# EAGLE board PowerloggerBrd (EAGLE 9.7.0)
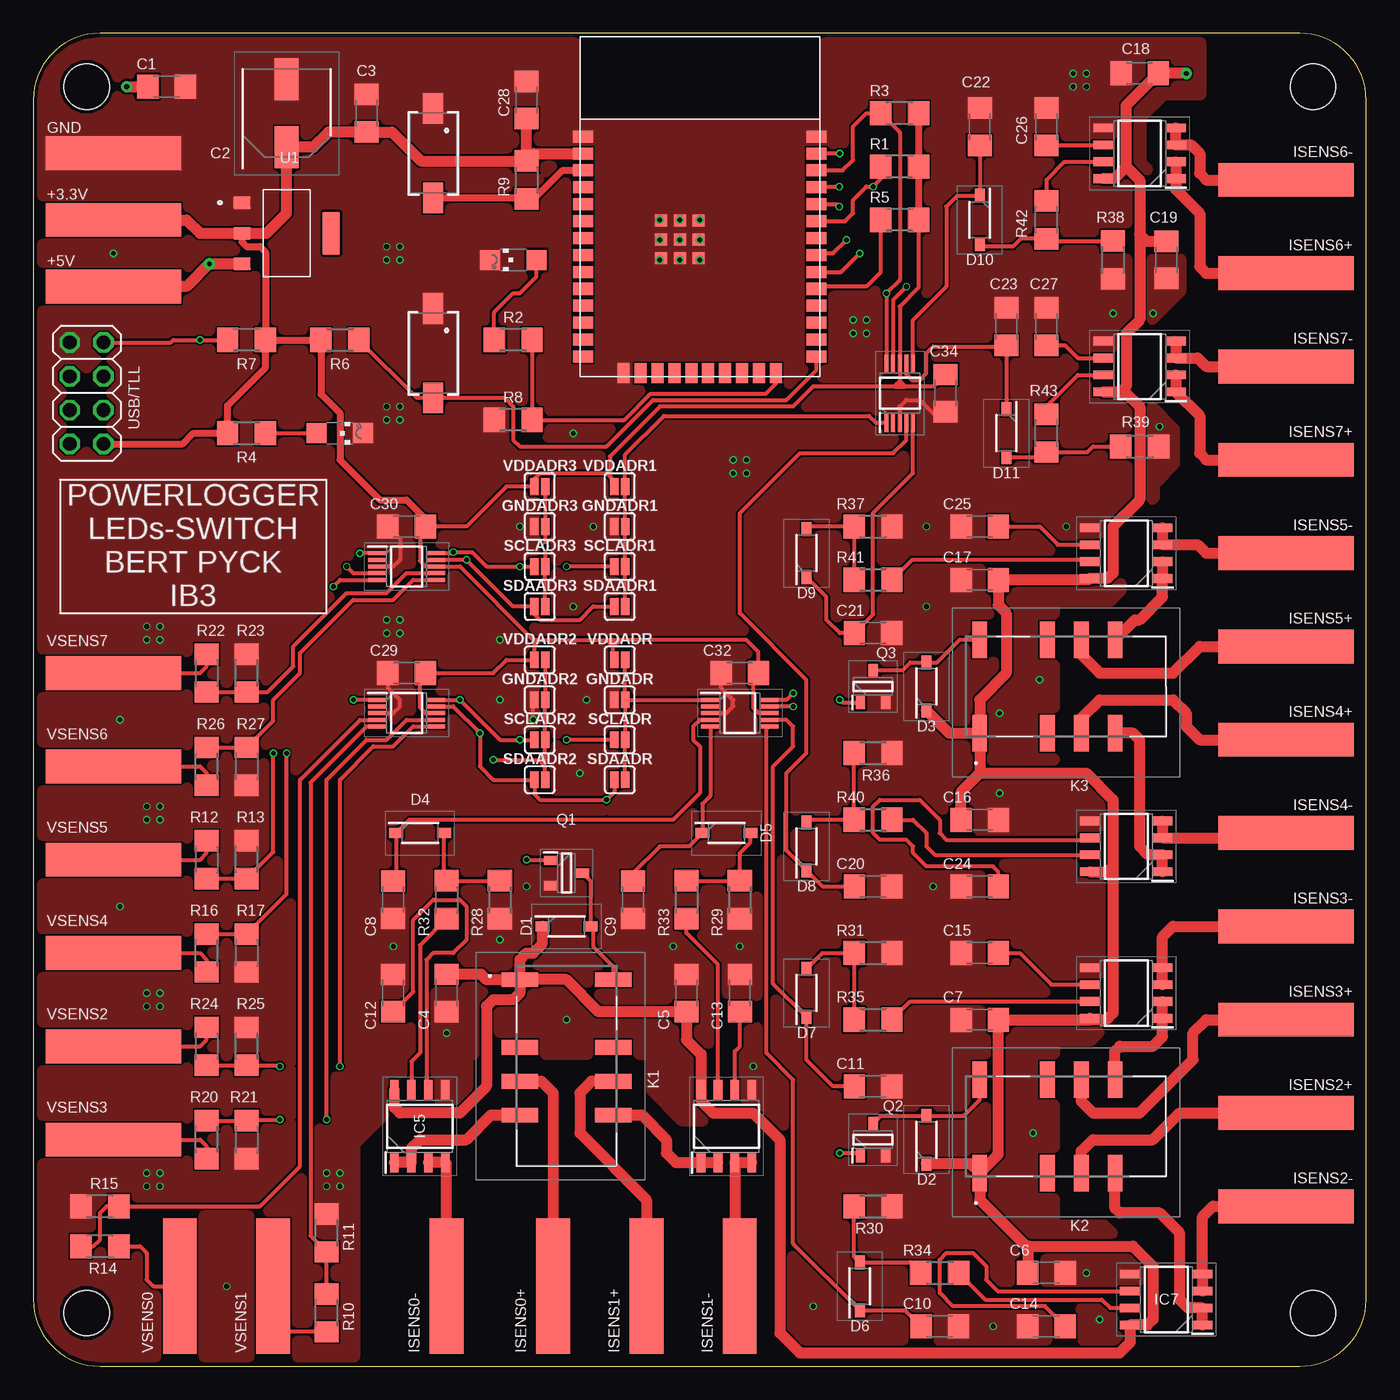
[diagram p0: board, top side]
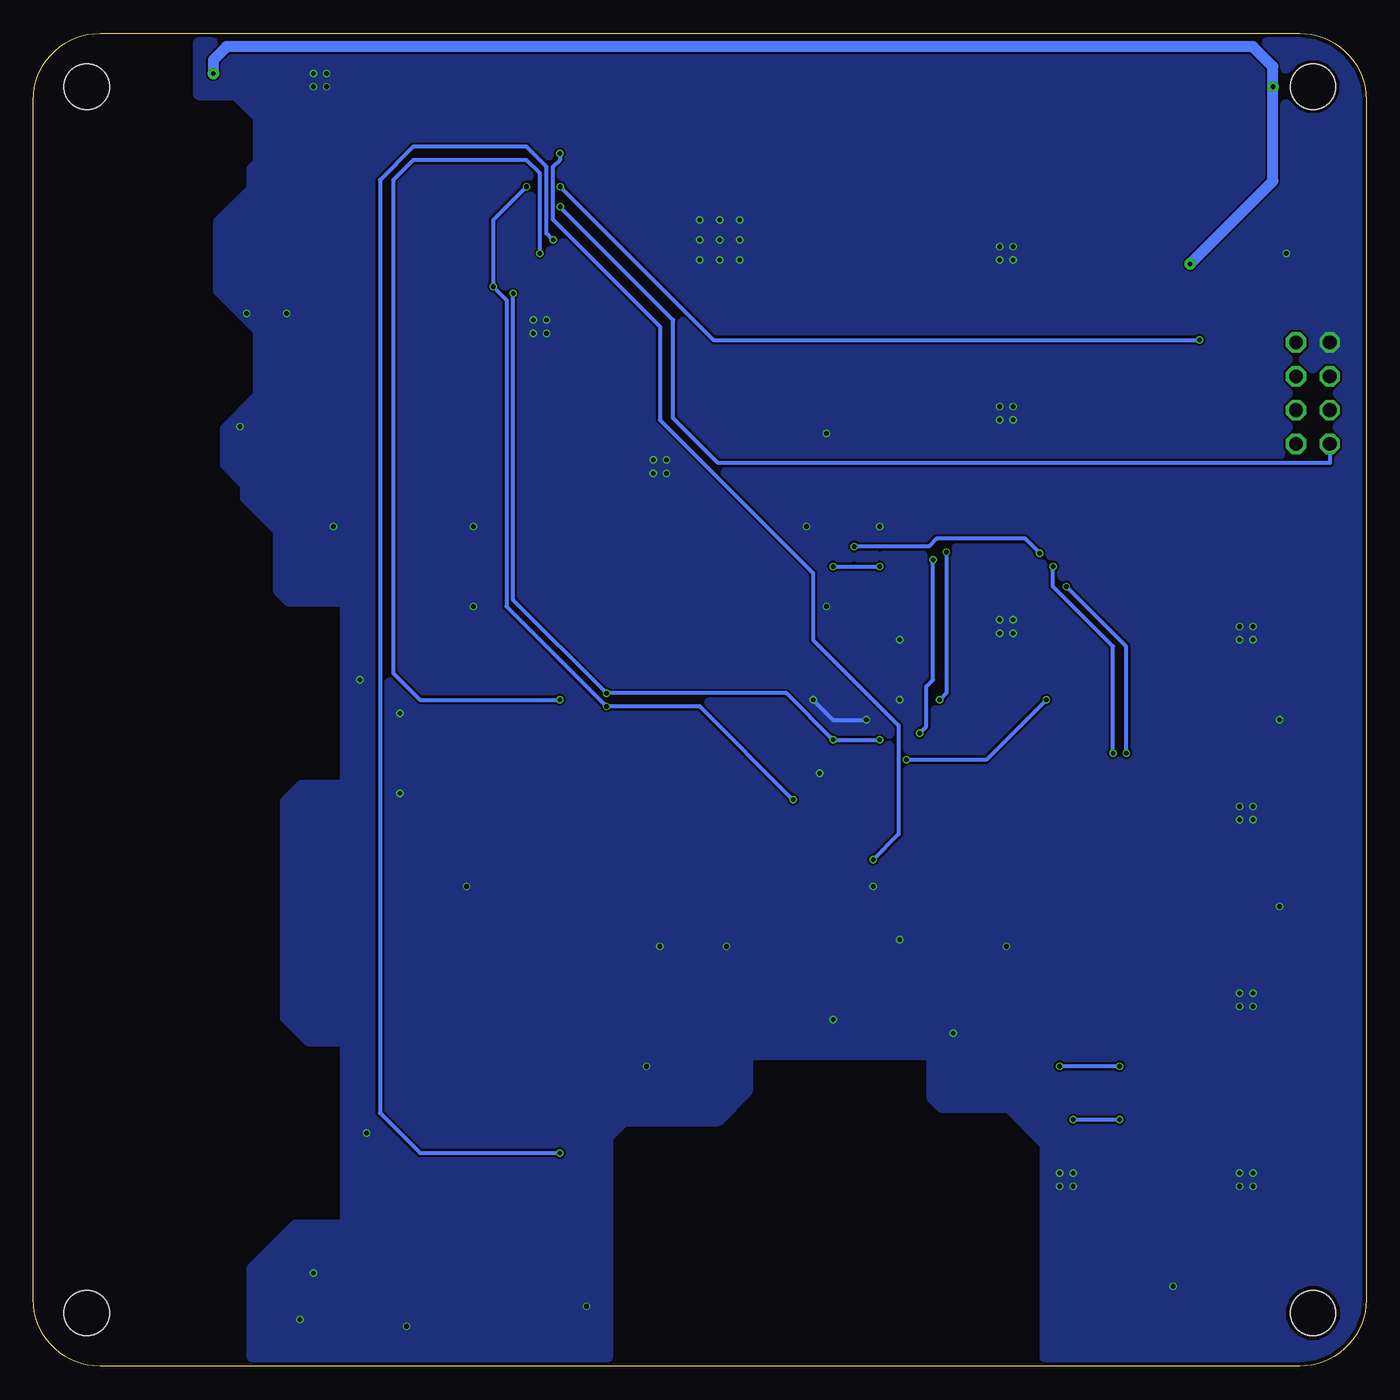
[diagram p1: board, bottom side, seen from below]

Size 100 x 100 mm. Coordinates in mm from the lower left corner, seen from the top.
Outline: 0,95 0,5 arc90 5,0 95,0 arc90 100,5 100,95 arc90 95,100 5,100 arc90 0,95
Copper layers (1*16): Top / Bottom
Stack-up Default Layer Stack: Top User Defined 0.035mm / Dielectric-1 User Defined 1.5mm / Bottom User Defined 0.035mm
Design rules: minimum copper width 6mil, minimum drill size 0.3mm, copper clearance wire_polygon to wire_polygon 6mil, copper clearance wire_polygon to pad_smd 6mil, copper clearance wire_polygon to via 6mil, copper clearance pad_smd to pad_smd 6mil, copper clearance pad_smd to via 6mil, copper clearance via to via 6mil, copper clearance smd to pad (same net) 0mil, copper clearance smd to via (same net) 0mil, copper clearance smd to smd (same net) 0mil, dimension clearance 0.3mm, via restrict clearance 0mil, restrict clearance 0mil, drill distance 10mil, keepout clearance 0mil
Holes 3.4 mm at 4,96 96,96 96,4 4,4

## Footprints (pad centres in the part's own frame; a part is rotated, then mirrored left to right if it is on the bottom)
SOLDERPAD = smd 2.54 x 10.16: 1 0,0
C1206 = smd 1.6 x 1.8: 1 -1.4,0; 2 1.4,0
CAPAE660X550N = smd 3.15 x 1.8: 1 -2.55,0; 2 2.55,0
SOD3715X135N = smd 1.05 x 0.75: 1 -1.8,0; 2 1.8,0
SMT-JUMPER_2_NC_PASTE_SILK = smd 0.635 x 1.27: 1 -0.406,0; 2 0.406,0
SOP50P490X110-10N = smd 1.4 x 0.3: 1 -2.2,1; 2 -2.2,0.5; 3 -2.2,0; 4 -2.2,-0.5; 5 -2.2,-1; 6 2.2,-1; 7 2.2,-0.5; 8 2.2,0; 9 2.2,0.5; 10 2.2,1
SOIC127P600X175-8N = smd 1.525 x 0.65: 1 -2.712,1.905; 2 -2.712,0.635; 3 -2.712,-0.635; 4 -2.712,-1.905; 5 2.712,-1.905; 6 2.712,-0.635; 7 2.712,0.635; 8 2.712,1.905
EE25NUXL = smd 1.11 x 2.73: 1 0,-3.51; 3 5.08,-3.51; 4 7.62,-3.51; 5 10.16,-3.51; 8 10.16,3.51; 9 7.62,3.51; 10 5.08,3.51; 12 0,3.51
CHIPLED_1206 = smd 1.5 x 1.5: A 0,-1.75; C 0,1.75
ESP32-WROOM-32E = smd 1.5 x 0.9: 1 -8.75,8.255; 2 -8.75,6.985; 3 -8.75,5.715; 4 -8.75,4.445; 5 -8.75,3.175; 6 -8.75,1.905; 7 -8.75,0.635; 8 -8.75,-0.635; 9 -8.75,-1.905; 10 -8.75,-3.175; 11 -8.75,-4.445; 12 -8.75,-5.715; 13 -8.75,-6.985; 14 -8.75,-8.255; 25 8.75,-8.255; 26 8.75,-6.985; 27 8.75,-5.715; 28 8.75,-4.445; 29 8.75,-3.175; 30 8.75,-1.905; 31 8.75,-0.635; 32 8.75,0.635; 33 8.75,1.905; 34 8.75,3.175; 35 8.75,4.445; 36 8.75,5.715; 37 8.75,6.985; 38 8.75,8.255 | smd 0.9 x 1.5: 15 -5.715,-9.505; 16 -4.445,-9.505; 17 -3.175,-9.505; 18 -1.905,-9.505; 19 -0.635,-9.505; 20 0.635,-9.505; 21 1.905,-9.505; 22 3.175,-9.505; 23 4.445,-9.505; 24 5.715,-9.505 | smd 0.9 x 0.9: GND@39 -2.9,1.935; GND@40 -1.5,1.935; GND@41 -0.1,1.935; GND@42 -2.9,0.535; GND@43 -1.5,0.535; GND@44 -0.1,0.535; GND@45 -2.9,-0.865; GND@46 -1.5,-0.865; GND@47 -0.1,-0.865
SOT95P240X120-3N = smd 1 x 0.7: 1 -1.2,0.95; 2 -1.2,-0.95; 3 1.2,0
R1206 = smd 1.6 x 1.803: 1 -1.422,0; 2 1.422,0
434111043826 = smd 2.3 x 1.5: 1 -3.35,0; 2 3.35,0
SOT229P700X180-4N = smd 1.31 x 0.93: 1 -3.345,2.29; 2 -3.345,0; 3 -3.345,-2.29 | smd 1.31 x 3.24: 4 3.345,0
2X04 = drill 1.016 octagon: 1 -3.81,-1.27; 2 -3.81,1.27; 3 -1.27,-1.27; 4 -1.27,1.27; 5 1.27,-1.27; 6 1.27,1.27; 7 3.81,-1.27; 8 3.81,1.27

## Placement (x,y rotation side)
+3.3V  [SOLDERPAD]  6,86 270 top
+5V  [SOLDERPAD]  6,81 270 top
C1  10µF  [C1206]  10,96 0 top
C2  47µF  [CAPAE660X550N]  19,94 90 top
C3  100nF  [C1206]  25,94 90 top
C4  0.1µF  [C1206]  31,28 270 top
C5  0.1µF  [C1206]  49,28 90 top
C6  0.1µF  [C1206]  76,7 0 top
C7  0.1µF  [C1206]  71,26 180 top
C8  [C1206]  27,35 270 top
C9  [C1206]  45,35 270 top
C10  [C1206]  68,3 0 top
C11  [C1206]  63,21 0 top
C12  1nF  [C1206]  27,28 90 top
C13  1nF  [C1206]  53,28 90 top
C14  1nF  [C1206]  76,3 180 top
C15  1nF  [C1206]  71,31 180 top
C16  0.1µF  [C1206]  71,41 0 top
C17  0.1µF  [C1206]  71,59 180 top
C18  0.1µF  [C1206]  83,97 180 top
C19  0.1µF  [C1206]  85,83 270 top
C20  [C1206]  63,36 0 top
C21  [C1206]  63,55 0 top
C22  [C1206]  71,93 90 top
C23  [C1206]  73,78 90 top
C24  1nF  [C1206]  71,36 180 top
C25  1nF  [C1206]  71,63 180 top
C26  1nF  [C1206]  76,93 90 top
C27  1nF  [C1206]  76,78 90 top
C28  100nF  [C1206]  37,95 90 top
C29  100nF  [C1206]  28,52 180 top
C30  100nF  [C1206]  28,63 180 top
C32  100nF  [C1206]  53,52 180 top
C34  100nF  [C1206]  68.45,73 270 top
D1  1N4148W-TP  [SOD3715X135N]  40,33 0 top
D2  1N4148W-TP  [SOD3715X135N]  67,17 90 top
D3  1N4148W-TP  [SOD3715X135N]  67,51 90 top
D4  1N4148W-TP  [SOD3715X135N]  29,40 0 top
D5  1N4148W-TP  [SOD3715X135N]  52,40 0 top
D6  1N4148W-TP  [SOD3715X135N]  62,6 90 top
D7  1N4148W-TP  [SOD3715X135N]  58,28 90 top
D8  1N4148W-TP  [SOD3715X135N]  58,39 90 top
D9  1N4148W-TP  [SOD3715X135N]  58,61 90 top
D10  1N4148W-TP  [SOD3715X135N]  71,86 270 top
D11  1N4148W-TP  [SOD3715X135N]  73,70 270 top
GND  [SOLDERPAD]  6,91 270 top
GNDADR  JUMPER-SMT_2_NC_PASTE_SILK  [SMT-JUMPER_2_NC_PASTE_SILK]  44,50 0 top
GNDADR1  JUMPER-SMT_2_NC_PASTE_SILK  [SMT-JUMPER_2_NC_PASTE_SILK]  44,63 0 top
GNDADR2  JUMPER-SMT_2_NC_PASTE_SILK  [SMT-JUMPER_2_NC_PASTE_SILK]  38,50 0 top
GNDADR3  JUMPER-SMT_2_NC_PASTE_SILK  [SMT-JUMPER_2_NC_PASTE_SILK]  38,63 0 top
IC1  ADS1115IDGST  [SOP50P490X110-10N]  53,49 0 top
IC2  ADS1115IDGST  [SOP50P490X110-10N]  65,73 90 top
IC3  ADS1115IDGST  [SOP50P490X110-10N]  28,49 0 top
IC4  ADS1115IDGST  [SOP50P490X110-10N]  28,60 0 top
IC5  ACS712ELCTR-05B-T  [SOIC127P600X175-8N]  29,18 90 top
IC6  ACS712ELCTR-05B-T  [SOIC127P600X175-8N]  52,18 90 top
IC7  ACS712ELCTR-05B-T  [SOIC127P600X175-8N]  85,5 180 top
IC8  ACS712ELCTR-05B-T  [SOIC127P600X175-8N]  82,28 180 top
IC9  ACS712ELCTR-05B-T  [SOIC127P600X175-8N]  82,39 180 top
IC10  ACS712ELCTR-05B-T  [SOIC127P600X175-8N]  82,61 180 top
IC11  ACS712ELCTR-05B-T  [SOIC127P600X175-8N]  83,91 180 top
IC12  ACS712ELCTR-05B-T  [SOIC127P600X175-8N]  83,75 180 top
ISENS0+  [SOLDERPAD]  39,6 0 top
ISENS0-  [SOLDERPAD]  31,6 0 top
ISENS1+  [SOLDERPAD]  46,6 0 top
ISENS1-  [SOLDERPAD]  53,6 0 top
ISENS2+  [SOLDERPAD]  94,19 90 top
ISENS2-  [SOLDERPAD]  94,12 90 top
ISENS3+  [SOLDERPAD]  94,26 90 top
ISENS3-  [SOLDERPAD]  94,33 90 top
ISENS4+  [SOLDERPAD]  94,47 90 top
ISENS4-  [SOLDERPAD]  94,40 90 top
ISENS5+  [SOLDERPAD]  94,54 90 top
ISENS5-  [SOLDERPAD]  94,61 90 top
ISENS6+  [SOLDERPAD]  94,82 270 top
ISENS6-  [SOLDERPAD]  94,89 270 top
ISENS7+  [SOLDERPAD]  94,68 270 top
ISENS7-  [SOLDERPAD]  94,75 270 top
K1  EE2-5NUX-L  [EE25NUXL]  40,29 270 top
K2  EE2-5NUX-L  [EE25NUXL]  71,18 0 top
K3  EE2-5NUX-L  [EE25NUXL]  71,51 0 top
LED1  BOOT  [CHIPLED_1206]  36,83 90 top
LED2  POWER  [CHIPLED_1206]  23,70 270 top
P1  ESP32-WROOM-32E  [ESP32-WROOM-32E]  50,84 0 top
Q1  BSS138  [SOT95P240X120-3N]  40,37 0 top
Q2  BSS138  [SOT95P240X120-3N]  63,17 90 top
Q3  BSS138  [SOT95P240X120-3N]  63,51 90 top
R1  2.2k  [R1206]  65,90 0 top
R2  1k  [R1206]  36,77 0 top
R3  2.2k  [R1206]  65,94 0 top
R4  1k  [R1206]  16,70 180 top
R5  10k  [R1206]  65,86 0 top
R6  10k  [R1206]  23,77 180 top
R7  10k  [R1206]  16,77 0 top
R8  10k  [R1206]  36,71 0 top
R9  10k  [R1206]  37,89 90 top
R10  [R1206]  22,4 270 top
R11  [R1206]  22,10 270 top
R12  [R1206]  13,38 90 top
R13  [R1206]  16,38 270 top
R14  [R1206]  5,9 0 top
R15  [R1206]  5,12 0 top
R16  [R1206]  13,31 270 top
R17  [R1206]  16,31 90 top
R20  [R1206]  13,17 270 top
R21  [R1206]  16,17 90 top
R22  [R1206]  13,52 90 top
R23  [R1206]  16,52 270 top
R24  [R1206]  13,24 90 top
R25  [R1206]  16,24 270 top
R26  [R1206]  13,45 270 top
R27  [R1206]  16,45 90 top
R28  [R1206]  35,35 90 top
R29  [R1206]  53,35 90 top
R30  [R1206]  63,12 180 top
R31  [R1206]  63,31 180 top
R32  [R1206]  31,35 90 top
R33  [R1206]  49,35 90 top
R34  [R1206]  68,7 180 top
R35  [R1206]  63,26 180 top
R36  [R1206]  63,46 180 top
R37  [R1206]  63,63 180 top
R38  [R1206]  81,83 90 top
R39  [R1206]  83,69 180 top
R40  [R1206]  63,41 180 top
R41  [R1206]  63,59 180 top
R42  [R1206]  76,86 270 top
R43  [R1206]  76,70 270 top
S1  BOOT  [434111043826]  30,76 270 top
S2  RESET  [434111043826]  30,91 270 top
SCLADR  JUMPER-SMT_2_NC_PASTE_SILK  [SMT-JUMPER_2_NC_PASTE_SILK]  44,47 0 top
SCLADR1  JUMPER-SMT_2_NC_PASTE_SILK  [SMT-JUMPER_2_NC_PASTE_SILK]  44,60 0 top
SCLADR2  JUMPER-SMT_2_NC_PASTE_SILK  [SMT-JUMPER_2_NC_PASTE_SILK]  38,47 0 top
SCLADR3  JUMPER-SMT_2_NC_PASTE_SILK  [SMT-JUMPER_2_NC_PASTE_SILK]  38,60 0 top
SDAADR  JUMPER-SMT_2_NC_PASTE_SILK  [SMT-JUMPER_2_NC_PASTE_SILK]  44,44 0 top
SDAADR1  JUMPER-SMT_2_NC_PASTE_SILK  [SMT-JUMPER_2_NC_PASTE_SILK]  44,57 0 top
SDAADR2  JUMPER-SMT_2_NC_PASTE_SILK  [SMT-JUMPER_2_NC_PASTE_SILK]  38,44 0 top
SDAADR3  JUMPER-SMT_2_NC_PASTE_SILK  [SMT-JUMPER_2_NC_PASTE_SILK]  38,57 0 top
U1  AMS1117-3.3  [SOT229P700X180-4N]  19,85 0 top
USB/TLL  PINHD-2X4  [2X04]  4,73 270 top
VDDADR  JUMPER-SMT_2_NC_PASTE_SILK  [SMT-JUMPER_2_NC_PASTE_SILK]  44,53 0 top
VDDADR1  JUMPER-SMT_2_NC_PASTE_SILK  [SMT-JUMPER_2_NC_PASTE_SILK]  44,66 0 top
VDDADR2  JUMPER-SMT_2_NC_PASTE_SILK  [SMT-JUMPER_2_NC_PASTE_SILK]  38,53 0 top
VDDADR3  JUMPER-SMT_2_NC_PASTE_SILK  [SMT-JUMPER_2_NC_PASTE_SILK]  38,66 0 top
VSENS0  [SOLDERPAD]  11,6 180 top
VSENS1  [SOLDERPAD]  18,6 180 top
VSENS2  [SOLDERPAD]  6,24 90 top
VSENS3  [SOLDERPAD]  6,17 90 top
VSENS4  [SOLDERPAD]  6,31 90 top
VSENS5  [SOLDERPAD]  6,38 90 top
VSENS6  [SOLDERPAD]  6,45 90 top
VSENS7  [SOLDERPAD]  6,52 90 top

## Library data of the parts
+3.3V +5V GND ISENS0+ ISENS0- ISENS1+ ISENS1- ISENS2+ ISENS2- ISENS3+ ISENS3- ISENS4+ ISENS4- ISENS5+ ISENS5- ISENS6+ ISENS6- ISENS7+ ISENS7- VSENS0 VSENS1-VSENS7 = LibraryLEDs
C1 C3-C30 C32 C34 R1-R17 R20-R43 = resistor
C2 = 865080543009; DESCRIPTION: Wurth Elektronik 47uF 35 V dc Aluminium Electrolytic Capacitor, WCAP-ASLI Series 2000h 6.3 (Dia.) x 5.35mm; HEIGHT: 5.5mm; MANUFACTURER_NAME: Wurth Elektronik; MANUFACTURER_PART_NUMBER: 865080543009; MOUSER_PART_NUMBER: 710-865080543009; MOUSER_PRICE-STOCK: https://www.mouser.co.uk/ProductDetail/Wurth-Elektronik/865080543009?qs=0KOYDY2FL2%2F%252BYmhMLtEhDQ%3D%3D
D1-D11 = 1N4148W-TP; DESCRIPTION: Switching Diodes; HEIGHT: 1.35mm; MANUFACTURER_NAME: MCC; MANUFACTURER_PART_NUMBER: 1N4148W-TP; MOUSER_PART_NUMBER: 833-1N4148W-TP; MOUSER_PRICE-STOCK: https://www.mouser.co.uk/ProductDetail/Micro-Commercial-Components-MCC/1N4148W-TP?qs=KFo7JewZbUH7wCMabJ4EeQ%3D%3D
GNDADR GNDADR1-GNDADR3 SCLADR SCLADR1-SCLADR3 SDAADR SDAADR1-SDAADR3 VDDADR VDDADR1-VDDADR3 = SparkFun-Jumpers
IC1-IC4 = ADS1115IDGST; DESCRIPTION: 16-Bit, 860SPS, 4-Ch Delta-Sigma ADC w/ PGA, Oscillator, Voltage Reference, Comparator & I2C; HEIGHT: 1.1mm; MANUFACTURER_NAME: Texas Instruments; MANUFACTURER_PART_NUMBER: ADS1115IDGST; MOUSER_PART_NUMBER: 595-ADS1115IDGST; MOUSER_PRICE-STOCK: https://www.mouser.co.uk/ProductDetail/Texas-Instruments/ADS1115IDGST?qs=6805eV47HhY3JIwOhQ2zog%3D%3D
IC5-IC12 = ACS712ELCTR-05B-T; DESCRIPTION: Fully Integrated, Hall-Effect-Based Linear Current Sensor IC with 2.1 kVRMS Voltage Isolation and a Low-Resistance Current Conductor; HEIGHT: 1.75mm; MANUFACTURER_NAME: Allegro Microsystems; MANUFACTURER_PART_NUMBER: ACS712ELCTR-05B-T; MOUSER_PART_NUMBER: 250-712ELCTR05BT; MOUSER_PRICE-STOCK: https://www.mouser.co.uk/ProductDetail/Allegro-MicroSystems/ACS712ELCTR-05B-T?qs=pUKx8fyJudDs65Rkshv5ug%3D%3D
K1-K3 = EE2-5NUX-L; DESCRIPTION: KEMET, EE2, Relays, Signal, 5 V, 220 V, 250 VAC, 2 A, 75 mOhms, 1 GOhms, 15mm, 7.5mm, 10.35mm; HEIGHT: 10.35mm; MANUFACTURER_NAME: KEMET; MANUFACTURER_PART_NUMBER: EE2-5NUX-L; MOUSER_PART_NUMBER: 80-EE2-5NUX-L; MOUSER_PRICE-STOCK: https://www.mouser.co.uk/ProductDetail/KEMET/EE2-5NUX-L?qs=UeqeubEbzTWGy72jgjuAog%3D%3D
LED1 LED2 = led
P1 = LibraryESP; AVAILABILITY: In Stock; CHECK_PRICES: https://www.snapeda.com/parts/ESP32-WROOM-32E/Espressif+Systems/view-part/?ref=eda; DESCRIPTION: RX TXRX MOD WIFI TRACE ANT SMD; MF: Espressif Systems; MP: ESP32-WROOM-32E; PACKAGE: SMD-44 Espressif Systems; PRICE: None; SNAPEDA_LINK: https://www.snapeda.com/parts/ESP32-WROOM-32E/Espressif+Systems/view-part/?ref=snap
Q1-Q3 = BSS138; DESCRIPTION: N-channel MOSFET,BSS138 0.2A 50V; HEIGHT: 1.2mm; MANUFACTURER_NAME: onsemi; MANUFACTURER_PART_NUMBER: BSS138; MOUSER_PART_NUMBER: 512-BSS138; MOUSER_PRICE-STOCK: https://www.mouser.co.uk/ProductDetail/onsemi-Fairchild/BSS138?qs=HK%252BeIG1iaahCeqBvjB4arg%3D%3D
S1 S2 = 434111043826; AVAILABILITY: Not in stock; CHECK_PRICES: https://www.snapeda.com/parts/434111043826/Wurth+Electronics+Inc./view-part/?ref=eda; DESCRIPTION: Tactile Switch SPST-NO Top Actuated Surface Mount; MF: Wurth Electronics; MP: 434111043826; PACKAGE: None; PRICE: None; PURCHASE-URL: https://www.snapeda.com/api/url_track_click_mouser/?unipart_id=4218709&manufacturer=Wurth Electronics&part_name=434111043826&search_term=434111043826; SNAPEDA_LINK: https://www.snapeda.com/parts/434111043826/Wurth+Electronics+Inc./view-part/?ref=snap
U1 = AMS1117-3.3; AVAILABILITY: Not in stock; CHECK_PRICES: https://www.snapeda.com/parts/AMS1117-3.3/Advanced+Monolithic+Systems/view-part/?ref=eda; DESCRIPTION: Sot223/Pkg 1-Amp 3.3-Volt Low Drop Out Voltage Regulatator; MF: Advanced Monolithic Systems; MP: AMS1117-3.3; PACKAGE: SOT-223 Seeed Technology; PRICE: None; SNAPEDA_LINK: https://www.snapeda.com/parts/AMS1117-3.3/Advanced+Monolithic+Systems/view-part/?ref=snap
USB/TLL = Connector; CATEGORY: Headers; DESCRIPTION: Header, Straight, 2x4 Position; MANUFACTURER: Generic; MPN: Generic; OPERATING_TEMPERATURE: Generic; PART_STATUS: Active; PITCH: 0.100" (2.54mm); ROHS_COMPLIANCE: Generic; SERIES: Generic; SUB-CATEGORY: Headers, Male Pins; TYPE: Board to Board or Cable, Unshrouded, Through Hole, Straight

## Nets
+3.3V: +3.3V.1 C2.1 C3.1 C28.1 C29.1 C30.1 C32.1 C34.1 IC1.8 IC2.8 IC3.8 IC4.8 P1.2 R1.2 R3.2 R4.2 R5.2 R6.2 R7.2 R9.2 U1.2 USB/TLL.8 VDDADR1.1 VDDADR2.1 VDDADR3.1 VDDADR.1
+5V: +5V.1 C1.1 C4.1 C5.1 C6.1 C7.1 C16.1 C17.1 C18.1 C19.1 D1.1 D2.1 D3.1 IC5.8 IC6.8 IC7.8 IC8.8 IC9.8 IC10.8 IC11.8 IC12.8 K1.1 K2.1 K3.1 U1.3
AIN0: C8.1 D4.1 IC1.4
AIN1: C9.1 D5.1 IC1.5
AIN2: C10.1 D6.1 IC1.6
AIN3: C11.1 D7.1 IC1.7
AIN4: C20.1 D8.1 IC2.4
AIN5: C21.1 D9.1 IC2.5
AIN6: C22.1 D10.1 IC2.6
AIN7: C23.1 D11.1 IC2.7
EN: P1.3 R9.1 S2.2
GND: C1.2 C2.2 C3.2 C4.2 C5.2 C6.2 C7.2 C8.2 C9.2 C10.2 C11.2 C12.2 C13.2 C14.2 C15.2 C16.2 C17.2 C18.2 C19.2 C20.2 C21.2 C22.2 C23.2 C24.2 C25.2 C26.2 C27.2 C28.2 C29.2 C30.2 C32.2 C34.2 GND.1 GNDADR1.1 GNDADR2.1 GNDADR3.1 GNDADR.1 IC1.3 IC2.3 IC3.3 IC4.3 IC5.5 IC6.5 IC7.5 IC8.5 IC9.5 IC10.5 IC11.5 IC12.5 LED1.C LED2.C P1.1 P1.15 P1.38 P1.GND@39 P1.GND@40 P1.GND@41 P1.GND@42 P1.GND@43 P1.GND@44 P1.GND@45 P1.GND@46 P1.GND@47 Q1.2 Q2.2 Q3.2 R8.1 R11.1 R13.1 R15.1 R17.1 R21.1 R23.1 R25.1 R27.1 R28.1 R29.1 R30.1 R31.1 R36.1 R37.1 R38.1 R39.1 S1.1 S2.1 U1.1 USB/TLL.1
GPIO0: P1.25 R6.1 S1.2
GPIO2: P1.24 R2.2 R8.2
GPIO4: P1.26
GPIO5: P1.29 R5.1
GPIO12: P1.14
GPIO13: P1.16
GPIO14: P1.13
GPIO15: P1.23
GPIO18: P1.30 Q3.1
GPIO19: P1.31 Q2.1
GPIO23: P1.37 Q1.1
GPIO25: P1.10
GPIO26: P1.11
GPIO27: P1.12
GPIO32: P1.8
GPIO33: P1.9
GPIO34: P1.6
GPIO35: P1.7
N$1: LED1.A R2.1
N$2: LED2.A R4.1
N$3: D1.2 K1.12 Q1.3
N$5: ISENS0+.1 K1.4
N$6: ISENS2+.1 K2.4
N$7: IC3.4 R14.1 R15.2
N$8: ISENS1+.1 K1.9
N$9: ISENS3+.1 K2.9
N$10: D2.2 K2.12 Q2.3
N$11: IC3.5 R10.1 R11.2
N$12: IC4.4 R16.1 R17.2
N$13: IC4.5 R12.1 R13.2
N$14: IC3.7 R20.1 R21.2
N$15: IC3.6 R24.1 R25.2
N$16: IC4.7 R22.1 R23.2
N$17: D3.2 K3.12 Q3.3
N$18: IC4.6 R26.1 R27.2
N$19: ISENS4+.1 K3.4
N$20: R10.2 VSENS1.1
N$21: R14.2 VSENS0.1
N$22: ISENS5+.1 K3.9
N$23: R20.2 VSENS3.1
N$24: GNDADR.2 IC1.1 SCLADR.2 SDAADR.2 VDDADR.2
N$25: GNDADR1.2 IC2.1 SCLADR1.2 SDAADR1.2 VDDADR1.2
N$27: C12.1 IC5.6
N$28: IC5.7 R32.1
N$29: D4.2 R28.2 R32.2
N$30: C13.1 IC6.6
N$31: R24.2 VSENS2.1
N$32: IC5.3 IC5.4 ISENS0-.1
N$33: IC6.7 R33.1
N$34: D5.2 R29.2 R33.2
N$35: R12.2 VSENS5.1
N$36: IC6.3 IC6.4 ISENS1-.1
N$37: C14.1 IC7.6
N$38: IC7.7 R34.1
N$39: D6.2 R30.2 R34.2
N$40: R16.2 VSENS4.1
N$41: IC7.3 IC7.4 ISENS2-.1
N$42: C15.1 IC8.6
N$43: IC8.7 R35.1
N$44: D7.2 R31.2 R35.2
N$45: R22.2 VSENS7.1
N$46: IC8.3 IC8.4 ISENS3-.1
N$47: C24.1 IC9.6
N$48: IC9.7 R40.1
N$49: D8.2 R36.2 R40.2
N$50: R26.2 VSENS6.1
N$51: IC9.3 IC9.4 ISENS4-.1
N$52: C25.1 IC10.6
N$53: IC10.7 R41.1
N$54: D9.2 R37.2 R41.2
N$55: GNDADR3.2 IC4.1 SCLADR3.2 SDAADR3.2 VDDADR3.2
N$56: IC10.3 IC10.4 ISENS5-.1
N$57: C26.1 IC11.6
N$58: IC11.7 R42.1
N$59: D10.2 R38.2 R42.2
N$60: IC11.1 IC11.2 ISENS6+.1
N$61: IC11.3 IC11.4 ISENS6-.1
N$62: C27.1 IC12.6
N$63: IC12.7 R43.1
N$64: D11.2 R39.2 R43.2
N$65: IC12.1 IC12.2 ISENS7+.1
N$66: IC12.3 IC12.4 ISENS7-.1
N$67: GNDADR2.2 IC3.1 SCLADR2.2 SDAADR2.2 VDDADR2.2
NO0: IC5.1 IC5.2 K1.5
NO1: IC6.1 IC6.2 K1.8
NO2: IC7.1 IC7.2 K2.5
NO3: IC8.1 IC8.2 K2.8
NO4: IC9.1 IC9.2 K3.5
NO5: IC10.1 IC10.2 K3.8
RXD: P1.34 USB/TLL.7
SCL: IC1.10 IC2.10 IC3.10 IC4.10 P1.36 R3.1 SCLADR1.1 SCLADR2.1 SCLADR3.1 SCLADR.1
SDA: IC1.9 IC2.9 IC3.9 IC4.9 P1.33 R1.1 SDAADR1.1 SDAADR2.1 SDAADR3.1 SDAADR.1
TXD: P1.35 R7.1 USB/TLL.2

## Tracks (layer width: path | path; a pad name or v marks a point on that pad's centre or on a via)
+3.3V
  Top 0.305: C34.1 67.55,73.5 65.42,73.5 | 65.42,73.5 65,73.92 | 65,73.92 IC2.8 65,79.5 66.42,80.92 R5.2 | IC3.8 29.42,49 29,49.42 29,51.5 29.4,51.9 C29.1 34.5,52 35.5,53 VDDADR2.1 37.59,54.09 | IC1.8 54.42,49 54,49.42 54,51.5 54.4,51.9 C32.1 54.4,53.6 53.5,54.5 44,54.5 | 37.59,54.09 38,54.5 | 38,54.5 43,54.5 | 43,54.5 43.5,54.5 | 43.5,54.5 44,54.5 | VDDADR.1 43.5,53.09 43.5,54 | 43.5,54.5 43.5,54 | 43.5,54 44,54.5 | 43,54.5 43.5,54 | 43,67 38,67 37.59,66.59 VDDADR3.1 35.5,66 32.5,63 C30.1 29.4,62.9 29,62.5 29,60.42 29.42,60 IC4.8 32,60 37.5,54.5 | 43.25,66.75 43.59,66.41 VDDADR1.1 | 37.5,54.5 37.59,54.41 37.59,54.09 | 38,54.5 37.5,54.5 | 64.58,73.5 58.5,73.5 57,72 47,72 43.25,68.25 43.25,67.25 | 64.58,73.5 65,73.5 | 65,73.5 65.42,73.5 | 65,73.5 65,73.92 | 65,73.92 64.58,73.5 | 43.25,67.25 43.25,66.75 | 43,67 43.25,67.25 | 43,67 43.25,66.75
  Top 0.508: USB/TLL.8 11.19,69.19 12,70 R4.2 14.58,72.08 17.42,74.92 R7.2 | R7.2 R6.2 21.58,72.92 23,71.5 23,68 26,65 28,65 29.4,63.6 C30.1 | R5.2 R1.2 R3.2 | U1.2 15.65,84.34 16,84 17,84 17.42,83.58 R7.2
  Top 0.813: +3.3V.1 11.5,86 12.5,85 U1.2 17.5,85 19,86.5 C2.1 21,91.45 22.15,92.6 C3.1 26.9,92.6 29.08,90.42 R9.2 | R9.2 C28.1 | R9.2 37.56,90.98 P1.2
+5V  (via drill 0.35 pad 0.85)
  Top 0.813: +5V.1 11.5,81 v13.21,82.71 U1.3 | v7,96 C1.1 | v86.5,97 C18.1 82,94.6 82,90 | 82,90 81.09,89.09 IC11.8 | 82,90 83,89 83,84.9 | C19.1 83.5,84.4 83,84.9 | 83,84.9 83,78.5 82,77.5 82,73.5 81.59,73.09 IC12.8 81.91,73.09 83,72 83,65 81,63 81,59.5 80.59,59.09 IC10.8 79.19,59 C17.1 72.4,57.1 73,56.5 73,52 71,50 K3.1 | D3.1 68.71,47.49 K3.1 | C16.1 69.6,43.1 71,44.5 | K3.1 71,44.5 | 71,44.5 79,44.5 81,42.5 81,37.5 | 81,37.5 80.59,37.09 | IC9.8 80.59,37.09 | 81,37.5 81,36.69 | 81,36.69 81,26.5 80.5,26 79.38,26 | 79.38,26 IC8.8 | 80.59,37.09 81,36.69 | 79.38,26 C7.1 72.4,15.89 K2.1 | K2.1 70.29,15.2 D2.1 | K2.1 71,12.5 74.6,8.9 | 74.6,8.9 C6.1 | 74.6,8.9 74.7,9 82.5,9 84,7.5 84,3.5 83.59,3.1 IC7.8 82.29,1.79 81.5,1 57.5,1 56,2.5 56,17 54,19 51,19 50.09,19.91 IC6.8 50.09,23.41 49,24.5 C5.1 42.4,26.6 39.99,29.01 K1.1 | C4.1 33.6,29.4 34,29 K1.1 | K1.1 36.5,30.5 37,31 37.5,31 38.2,31.7 D1.1 | K1.1 36.5,28 36,27.5 34.5,27.5 34,27 34,21 32,19 27.5,19 27.09,19.41 IC5.8
  Bottom 0.813: v13.21,82.71 7,88.92 v7,96 7,97.5 8.5,99 85.5,99 86.5,98 v86.5,97
AIN0
  Top 0.305: C8.1 27.2,36.6 D4.1 28.2,41 48,41 50,43 50,46.5 49.5,47 49.5,48 50,48.5 IC1.4
AIN1
  Top 0.305: C9.1 45,37 47,39 49.2,39 D5.1 50.2,42.2 50.8,42.8 IC1.5
AIN2
  Top 0.305: C10.1 65.4,4.2 D6.1 57,9.2 57,21.5 55,23.5 55,47.8 IC1.6
AIN3
  Top 0.305: C11.1 60,21 58,23 D7.1 55.5,28.7 55.5,45 57,46.5 57,48 56.5,48.5 IC1.7
AIN4
  Top 0.305: C20.1 59.2,36 D8.1 56.5,38.7 56.5,44.5 58,46 58,51.5 53,56.5 53,64 57.5,68.5 64.5,68.5 65.5,69.5 IC2.4
AIN5
  Top 0.305: IC2.5 66,67 63,64 63,56.4 C21.1 60.5,55 59.5,56 59.5,57.7 D9.1
AIN6
  Top 0.305: C22.1 D10.1 69.3,87.8 68.5,87 68.5,81 66,78.5 IC2.6
AIN7
  Top 0.305: C23.1 73,76.5 | 73,76.5 D11.1 | IC2.7 65.5,74.42 65.92,74 66.5,74 67,74.5 67,76 67.5,76.5 73,76.5
EN
  Top 0.508: S2.2 36.93,87.65 R9.1 37.58,87.58 39.72,89.72 P1.3
GND  (via drill 0.35)
  Top 0.305: IC3.3 27,49 27.5,49.5 27.5,50 26.6,50.9 C29.2 | IC1.3 52,49 52.5,49.5 52.5,50 51.6,50.9 C32.2 | IC2.3 65,72 65.5,72.5 66.5,72.5 67.5,71.5 68.35,71.5 C34.2 | v37.5,48.5 37.5,49.91 GNDADR2.1 | C30.2 27.5,62.1 27.5,60.5 27,60 IC4.3
  Bottom 0.305: v41.5,50 40,48.5 v37.5,48.5
  other vias: 27.5,84 26.5,84 26.5,83 27.5,83 79,97 78,97 78,96 79,96 62.5,78.5 61.5,78.5 61.5,77.5 62.5,77.5 53.5,68 52.5,68 52.5,67 53.5,67 27.5,72 26.5,72 26.5,71 27.5,71 27.5,56 26.5,56 26.5,55 27.5,55 9.5,55.5 8.5,55.5 8.5,54.5 9.5,54.5 9.5,42 8.5,42 8.5,41 9.5,41 9.5,28 8.5,28 8.5,27 9.5,27 9.5,14.5 8.5,14.5 8.5,13.5 9.5,13.5 23,14.5 22,14.5 22,13.5 23,13.5 27,31.5 35,32 48,31.5 53,31.5 54,22.5 31,25 72,3 79,7 67.5,36 72.5,43 35,50 67,57 67,63 77.5,63 84.5,70.5 36.5,63 42,63 81,79 84,79 35,54.5 47,86 48.5,86 50,86 47,84.5 48.5,84.5 50,84.5 47,83 48.5,83 50,83 6.5,48.5 6.5,34.5 14.5,6 40,26 41,44.5 40.5,57 40.5,70 58.5,4.5 80,3.5 75,17.5 72.5,49 75.5,51.5 37,36 6,83.5
  pour Top (no thermals): 0,100 88,100 88,95 85,95 83.5,93.5 83.5,90.5 84,90 84,88.5 86.5,86 86.5,80.5 83.5,77.5 83.5,73 86,70.5 86,67.5 84.5,66 84.5,65 82,62.5 82,58 81,57 77,57 77,44 80,44 81.5,42.5 81.5,26 79.5,24 77,24 77,11 80.5,11 84,7.5 84,0 56.5,0 56.5,17 55.5,18 48.5,18 46,20.5 46,23 33,23 33,20 32,19 27,19 24.5,16.5 24.5,0 0,0
  pour Bottom (no thermals): 0,100 88,100 88,95 85,95 83.5,93.5 83.5,90.5 84,90 84,88.5 86.5,86 86.5,80.5 83.5,77.5 83.5,73 86,70.5 86,67.5 84.5,66 84.5,65 82,62.5 82,58 81,57 77,57 77,44 80,44 81.5,42.5 81.5,26 79.5,24 77,24 77,11 80.5,11 84,7.5 84,0 56.5,0 56.5,17 55.5,18 48.5,18 46,20.5 46,23 33,23 33,20 32,19 27,19 24.5,16.5 24.5,0 0,0
GPIO0
  Top 0.305: R6.1 28.77,72.65 S1.2 35.35,72.65 36,72 36,69.5 36.5,69 43,69 46.5,72.5 56.5,72.5 58.75,74.75 P1.25
GPIO2
  Top 0.305: R2.2 R8.2 44.35,71 46.31,72.96 54.96,72.96 55.72,73.72 P1.24
GPIO5
  Top 0.305: P1.29 58.92,81 62.5,81 63.58,82.08 R5.1
GPIO18  (via drill 0.35)
  Top 0.305: P1.30 60.59,82.09 v62,83.5 | v60.5,50 60.7,49.8 Q3.1
  Bottom 0.305: v62,83.5 62,89.5 63,90.5 71.5,90.5 73,89 73,52 71,50 v60.5,50
GPIO19  (via drill 0.35)
  Top 0.305: P1.31 58.88,83.5 60,83.5 v61,84.5 | v60.5,16 61.85,16 Q2.1
  Bottom 0.305: v61,84.5 61.5,85 61.5,90 63,91.5 71.5,91.5 74,89 74,19 71,16 v60.5,16
GPIO23  (via drill 0.35)
  Top 0.305: P1.37 58.77,91 v60.5,91 | v37,38 38.75,38 Q1.1
  Bottom 0.305: v60.5,91 60.5,90.5 61.04,89.96 61.04,86.04 53,78 53,71 41.5,59.5 41.5,54.5 35.08,48.08 35.08,39.92 v37,38
N$1
  Top 0.305: R2.1 34.58,79.08 36,80.5 36.5,80.5 37.75,81.75 LED1.A
N$2
  Top 0.305: R4.1 LED2.A
N$3
  Top 0.305: Q1.3 41.8,36.4 D1.2 42,32.8 42,31.5 43.51,29.99 K1.12
N$5
  Top 0.813: K1.4 38.12,21.38 39,20.5 ISENS0+.1
N$6
  Top 0.813: K2.4 78.62,16.12 79.5,17 84,17 86,19 ISENS2+.1
N$7
  Top 0.305: R14.1 4.5,9 5,9.5 5,11.5 5.5,12 R15.2 17,12 20,15 20,44 24.5,48.5 IC3.4
N$8
  Top 0.813: K1.9 41.88,21.38 41,20.5 41,17.5 46,12.5 ISENS1+.1
N$9
  Top 0.813: K2.9 78.62,19.88 79.5,19 83,19 87,23 87,25 88,26 ISENS3+.1
N$10
  Top 0.305: Q2.3 63.6,18.8 D2.2 69.8,18.8 71,20 K2.12
N$11
  Top 0.305: R10.1 R11.2 20.79,9.78 20.79,43.79 25,48 IC3.5
N$12  (via drill 0.35)
  Top 0.305: R16.1 R17.2 19,35.42 v19,46 | v23.5,60 24,59.5 IC4.4
  Bottom 0.305: v19,46 19,54 23.5,58.5 v23.5,60
N$13  (via drill 0.35)
  Top 0.305: R12.1 R13.2 18,38.58 v18,46 | v22.5,58.5 23,59 IC4.5
  Bottom 0.305: v18,46 18,54 v22.5,58.5
N$14  (via drill 0.35)
  Top 0.305: R20.1 R21.2 16.08,18.5 v18.5,18.5 | v22,18.5 22,44 25,47 26.5,47 28,48.5 IC3.7
  Bottom 0.305: v18.5,18.5 v22,18.5
N$15  (via drill 0.35)
  Top 0.305: R24.1 R25.2 18.42,22.58 v18.5,22.5 | v23,22.5 23,44 25.5,46.5 27,46.5 28.5,48 IC3.6
  Bottom 0.305: v18.5,22.5 v23,22.5
N$16
  Top 0.305: R22.1 R23.2 17.58,50.58 19.5,52.5 19.5,54 23.5,58 26.5,58 28,59.5 IC4.7
N$17
  Top 0.305: Q3.3 65.2,52.2 65.8,52.8 D3.2 67.8,52.8 69.51,54.51 K3.12
N$18
  Top 0.305: R26.1 R27.2 18,48.42 18,50 20,52 20,53.5 24,57.5 27,57.5 28.5,59 IC4.6
N$19
  Top 0.813: K3.4 78.62,48.62 80,50 85.5,50 86.5,49 86.5,48 87.5,47 ISENS4+.1
N$20
  Top 0.305: R10.2 19.08,2.58 19,2.5 18,3.5 VSENS1.1
N$21
  Top 0.305: R14.2 8,9 8.5,8.5 8.5,6.5 9,6 VSENS0.1
N$22
  Top 0.813: K3.9 78.62,53.38 80,52 85.5,52 87.5,54 ISENS5+.1
N$23
  Top 0.305: VSENS3.1 12.5,17 13,16.5 R20.2
N$24
  Top 0.305: SDAADR.2 SCLADR.2 GNDADR.2 | GNDADR.2 VDDADR.2 | GNDADR.2 IC1.1
N$25
  Top 0.305: SDAADR1.2 SCLADR1.2 GNDADR1.2 VDDADR1.2 44.41,68.41 47.3,71.3 62.7,71.3 63.2,70.8 IC2.1
N$27
  Top 0.305: C12.1 28.5,28.1 28.5,33.5 30,35 32,35 32.5,34.5 32.5,32 31.5,31 30,31 29.5,30.5 29.5,20.85 IC5.6
N$28
  Top 0.305: R32.1 29,31.58 29,23.5 28.36,22.86 IC5.7
N$29
  Top 0.305: D4.2 30.8,36.62 R32.2 R28.2
N$30
  Top 0.305: IC6.6 52.63,23.64 53,24 C13.1
N$31
  Top 0.305: VSENS2.1 12.5,24 13,24.5 R24.2
N$32
  Top 0.813: ISENS0-.1 31,15.19 IC5.4 IC5.3
N$33
  Top 0.305: IC6.7 51.37,30.14 49,32.5 R33.1
N$34
  Top 0.305: R33.2 R29.2 53,38.5 53.8,39.3 D5.2
N$35
  Top 0.305: VSENS5.1 12.5,38 13,38.5 R12.2
N$36
  Top 0.813: IC6.4 IC6.3 52.63,6.37 ISENS1-.1
N$37
  Top 0.305: C14.1 75.9,4.5 69,4.5 68,5.5 68,8 68.5,8.5 70.5,8.5 71.5,7.5 71.5,6.5 72.36,5.63 IC7.6
N$38
  Top 0.305: R34.1 71.42,5 80.15,5 80.79,4.37 IC7.7
N$39
  Top 0.305: R30.2 61.58,8.22 D6.2 65.78,7.8 R34.2
N$40
  Top 0.305: VSENS4.1 12.5,31 13,30.5 R16.2
N$41
  Top 0.813: IC7.3 IC7.4 87.71,11.21 88.5,12 ISENS2-.1
N$42
  Top 0.305: C15.1 74,31 76.36,28.64 IC8.6
N$43
  Top 0.305: R35.1 65.79,27.36 IC8.7
N$44
  Top 0.305: D7.2 59.2,31 R31.2 R35.2
N$45
  Top 0.305: VSENS7.1 12.5,52 13,52.5 R22.2
N$46
  Top 0.813: IC8.3 IC8.4 84.71,32.21 85.5,33 ISENS3-.1
N$47
  Top 0.305: C24.1 72.4,37.1 72,37.5 67,37.5 66,38.5 66,39 65.5,39.5 63.5,39.5 63,40 63,42 63.5,42.5 66.5,42.5 68,41 68,40 68.5,39.5 79.15,39.5 IC9.6
N$48
  Top 0.305: R40.1 66,41 67,40 67,39 67.64,38.37 IC9.7
N$49
  Top 0.305: R36.2 R40.2 58.2,41 D8.2
N$50
  Top 0.305: VSENS6.1 12.5,45 13,44.5 R26.2
N$51
  Top 0.813: IC9.4 IC9.3 93.64,39.63 ISENS4-.1
N$52
  Top 0.305: C25.1 75.5,63 76.86,61.63 IC10.6
N$53
  Top 0.305: R41.1 65.92,60.5 79.15,60.5 IC10.7
N$54
  Top 0.305: D9.2 58.2,63 R37.2 R41.2
N$55  (via drill 0.35)
  Top 0.305: VDDADR3.2 GNDADR3.2 v38.41,61.5 SCLADR3.2 SDAADR3.2 | IC4.1 v24.5,61
  Bottom 0.305: v38.41,61.5 32.82,61.5 32.24,62.08 25.58,62.08 v24.5,61
N$56
  Top 0.813: IC10.4 IC10.3 87.36,61.63 88,61 ISENS5-.1
N$57
  Top 0.305: C26.1 80.25,91.6 IC11.6
N$58
  Top 0.305: R42.1 76,89 77.36,90.36 IC11.7
N$59
  Top 0.305: R38.2 76.16,84.42 R42.2 74.08,84.58 73.5,84 71.2,84 D10.2
N$60
  Top 0.813: IC11.2 IC11.1 85.71,88.29 87.5,86.5 87.5,82.5 88,82 ISENS6+.1
N$61
  Top 0.813: IC11.4 IC11.3 86.86,91.64 87.5,91 87.5,89.5 88,89 ISENS6-.1
N$62
  Top 0.305: C27.1 77.4,76.6 78.36,75.64 IC12.6
N$63
  Top 0.305: R43.1 76,72 78.36,74.36 IC12.7
N$64
  Top 0.305: D11.2 75.62,68.2 R43.2 79.08,68.58 79.5,69 R39.2
N$65
  Top 0.813: IC12.2 IC12.1 87.5,71.31 87.5,68.5 88,68 ISENS7+.1
N$66
  Top 0.813: IC12.4 IC12.3 87.36,75.64 88,75 ISENS7-.1
N$67  (via drill 0.35)
  Top 0.305: SDAADR2.2 38.41,45 | 38.41,45.91 SCLADR2.2 GNDADR2.2 VDDADR2.2 | IC3.1 v24,50 | v34.5,45.5 38,45.5 | 38,45.5 38.41,45.91 | 38,45.5 38,45.41 38.41,45 | 38.41,45 38.41,45.5 | 38.41,45.5 38.41,45.91 | 38,45.5 38.41,45.5
  Bottom 0.305: v24,50 28.5,45.5 v34.5,45.5
NO0
  Top 0.813: IC5.1 IC5.2 28.36,16.36 29,17 32.5,17 34.34,18.84 K1.5
NO1
  Top 0.813: K1.8 45.66,18.84 47.5,17 47.5,16 48.21,15.29 IC6.1 IC6.2
NO2
  Top 0.813: IC7.1 IC7.2 86.64,4.37 86,5 86,10 84.5,11.5 81.5,11.5 81.16,11.84 K2.5
NO3
  Top 0.813: IC8.2 IC8.1 84.71,24.71 84,24 81.5,24 81.16,23.66 K2.8
NO4
  Top 0.813: IC9.1 IC9.2 83.64,38.37 83,39 83,47 82.5,47.5 K3.5
NO5
  Top 0.813: IC10.2 IC10.1 84.71,57.71 83,56 82.65,56 K3.8
RXD  (via drill 0.35)
  Top 0.305: P1.34 60.29,87.17 v60.46,87
  Bottom 0.305: USB/TLL.7 2.73,67.77 48.62,67.77 52,71.15 52,78.5 60.46,86.96 v60.46,87
SCL  (via drill 0.35)
  Top 0.305: P1.36 60.72,89.72 61.5,90.5 61.5,93 62.5,94 R3.1 65,92.58 65,81.5 v64,80.5 IC2.10 | SCLADR2.1 v36.5,47 35,47 v32,50 IC3.10 | SCLADR3.1 v36.5,60 34,60 32.92,61.08 v31.5,61.08 31.42,61 IC4.10 | SCLADR1.1 v40,60 | SCLADR.1 v40,47 | v57,50.5 56.5,50 IC1.10
  Bottom 0.305: v40,60 v36.5,60 | v36.5,47 v40,47 43.5,50.5 v57,50.5 64,57.5 v64,80.5 | v31.5,61.08 31.5,50.5 v32,50
SDA  (via drill 0.35)
  Top 0.305: P1.33 60.91,85.91 61.5,86.5 61.5,87.5 62.5,88.5 v63,88.5 63.58,89.08 R1.1 | v65.5,81 64.5,80 IC2.9 | SDAADR1.1 42,57 41,56 38,56 37.59,56.41 SDAADR3.1 36,57 v32.5,60.5 IC4.9 | SDAADR.1 43.59,43.09 v43,42.5 38,42.5 37.59,42.91 SDAADR2.1 34.5,44 33.5,45 v33.5,47.5 31.5,49.5 IC3.9 | v57,49.5 IC1.9
  Bottom 0.305: v63,88.5 65.5,86 v65.5,81 64.5,80 64.5,57 v57,49.5 50,49.5 v43,42.5 | v33.5,47.5 33,48 33,51 32.5,51.5 v32.5,60.5
TXD  (via drill 0.35)
  Top 0.305: USB/TLL.2 10.31,76.81 10.5,77 v12.5,77 R7.1 | P1.35 58.8,88.5 v60.46,88.5
  Bottom 0.305: v60.46,88.5 48.96,77 v12.5,77

## Text on the board
NamesTop: POWERLOGGER / LEDs-SWITCH / BERT PYCK / IB3